# EAGLE board MyRev_CC2541_Breakout_Board (EAGLE 6.4)
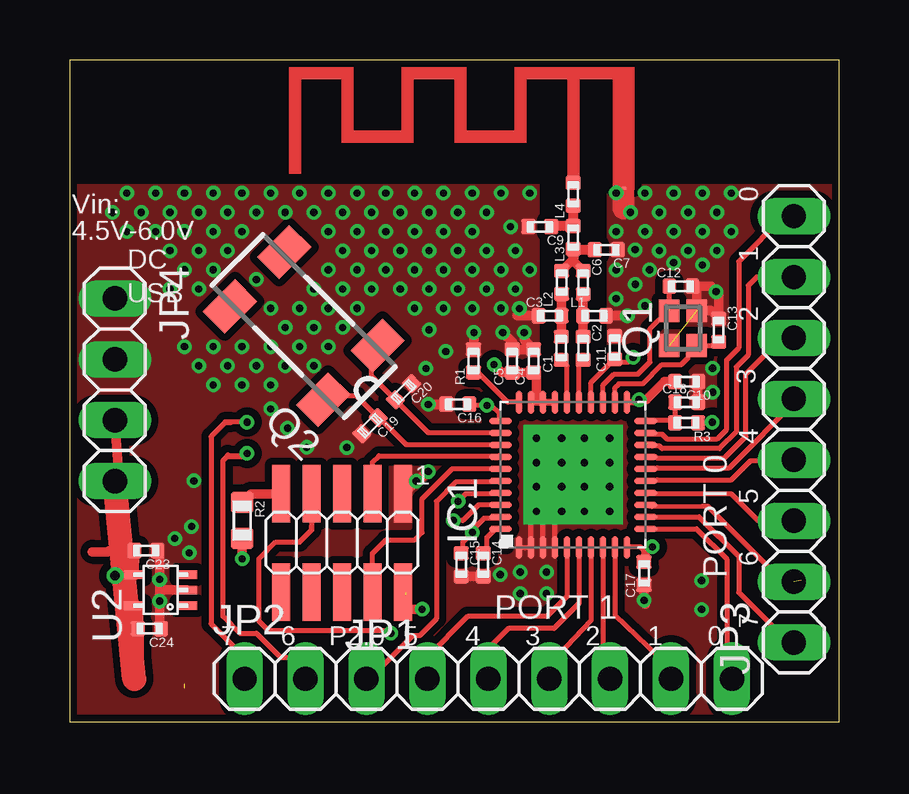
[diagram p0: board, top side]
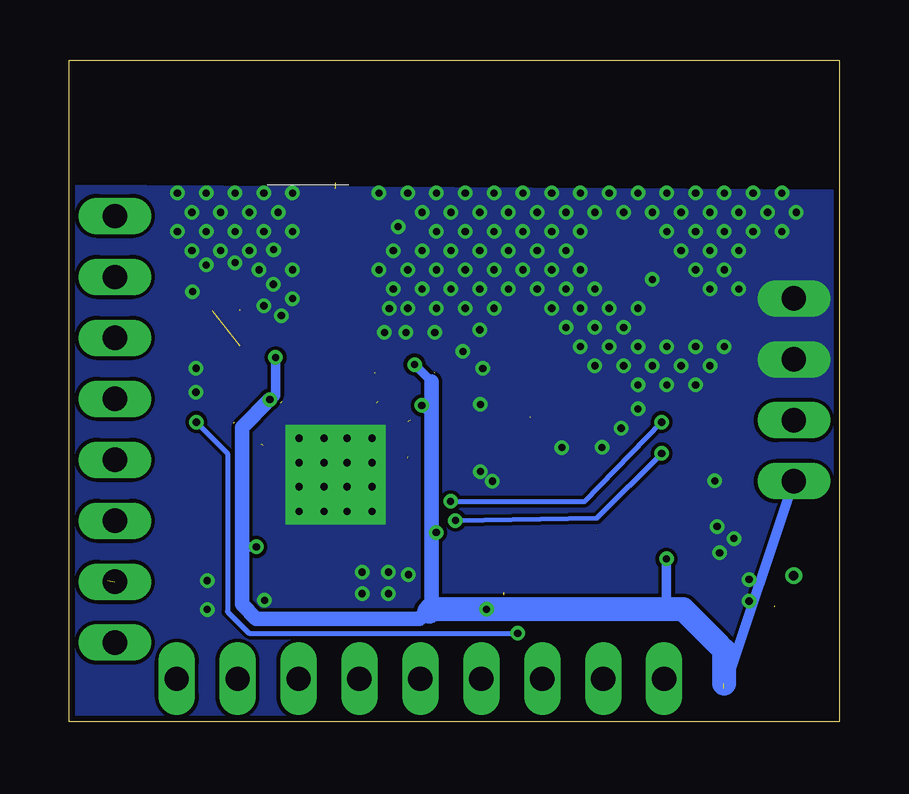
[diagram p1: board, bottom side, seen from below]

Size 32.1 x 27.6 mm. Coordinates in mm from the lower left corner, seen from the top.
Outline: 0,0 32.1,0 32.1,27.6 0,27.6 0,0
Copper layers (1*16): Top 0.035mm / dielectric 1.5mm / Bottom 0.035mm
Design rules "default": minimum track width 6mil, minimum drill 0.3mm, track to track 6mil, track to pad 6mil, pad to pad 6mil, via to via 6mil, smd to smd 0mil, copper to edge 10mil, drill to drill 10mil, minimum pad ring 10mil, minimum via ring 6mil, stop-mask expansion 2mil, vias tented up to drill 100mil, thermal gap 10mil

## Footprints (pad centres in the part's own frame; a part is rotated, then mirrored left to right if it is on the bottom)
TI_2.4GHZ_MIFA_LEFT = smd 0.2 x 0.1: FEED 0,-0.06; GND 2.1,-0.06
C0402 = smd 0.59 x 0.64: 1 -0.48,0; 2 0.48,0
QFN40-6X6 = smd 0.95 x 0.28: 1 -3.025,2.25; 2 -3.025,1.75; 3 -3.025,1.25; 4 -3.025,0.75; 5 -3.025,0.25; 6 -3.025,-0.25; 7 -3.025,-0.75; 8 -3.025,-1.25; 9 -3.025,-1.75; 10 -3.025,-2.25; 21 3.025,-2.25; 22 3.025,-1.75; 23 3.025,-1.25; 24 3.025,-0.75; 25 3.025,-0.25; 26 3.025,0.25; 27 3.025,0.75; 28 3.025,1.25; 29 3.025,1.75; 30 3.025,2.25 | smd 0.28 x 0.95: 11 -2.25,-3.025; 12 -1.75,-3.025; 13 -1.25,-3.025; 14 -0.75,-3.025; 15 -0.25,-3.025; 16 0.25,-3.025; 17 0.75,-3.025; 18 1.25,-3.025; 19 1.75,-3.025; 20 2.25,-3.025; 31 2.25,3.025; 32 1.75,3.025; 33 1.25,3.025; 34 0.75,3.025; 35 0.25,3.025; 36 -0.25,3.025; 37 -0.75,3.025; 38 -1.25,3.025; 39 -1.75,3.025; 40 -2.25,3.025 | drill 0.3 pad 1.1 square: EXP@1 -1.525,1.525; EXP@2 -0.5,1.525; EXP@3 0.5,1.525; EXP@4 1.525,1.525; EXP@5 -1.525,0.475; EXP@6 -0.5,0.475; EXP@7 0.5,0.475; EXP@8 1.525,0.475; EXP@9 -1.525,-0.475; EXP@10 -0.5,-0.475; EXP@11 0.5,-0.475; EXP@12 1.525,-0.475; EXP@13 -1.525,-1.525; EXP@14 -0.5,-1.525; EXP@15 0.5,-1.525; EXP@16 1.525,-1.525
2X05_1.27_SMD = smd 0.76 x 2.4: 1 -2.54,-2.05; 2 -2.54,2.05; 3 -1.27,-2.05; 4 -1.27,2.05; 5 0,-2.05; 6 0,2.05; 7 1.27,-2.05; 8 1.27,2.05; 9 2.54,-2.05; 10 2.54,2.05
1X09 = drill 1.016 long: 1 -10.16,0; 2 -7.62,0; 3 -5.08,0; 4 -2.54,0; 5 0,0; 6 2.54,0; 7 5.08,0; 8 7.62,0; 9 10.16,0
1X08 = drill 1.016 long: 1 -8.89,0; 2 -6.35,0; 3 -3.81,0; 4 -1.27,0; 5 1.27,0; 6 3.81,0; 7 6.35,0; 8 8.89,0
1X04 = drill 1.016 long: 1 -3.81,0; 2 -1.27,0; 3 1.27,0; 4 3.81,0
FA-128 = smd 0.95 x 0.85: 1 -0.725,-0.575; 2 0.725,-0.575; 3 0.725,0.575; 4 -0.725,0.575
MC-306 = smd 1.3 x 1.9: 1 -2.75,-1.6; 2 2.75,-1.6; 3 2.75,1.6; 4 -2.75,1.6
C0603 = smd 0.9 x 0.95: 1 -0.75,0; 2 0.75,0
SC70 = smd 0.35 x 0.85: 1 -0.65,-1.1; 2 0,-1.1; 3 0.65,-1.1; 4 0.65,1.1; 5 -0.65,1.1

## Placement (x,y rotation side)
A1  TI_2.4GHZ_MIFALEFT  [TI_2.4GHZ_MIFA_LEFT]  21,22.3 0 top
C1  18p  [C0402]  20.51,15.58 90 top
C2  18p  [C0402]  21.41,15.58 270 top
C3  1p  [C0402]  20.03,16.93 0 top
C4  220p  [C0402]  19.35,15.05 90 top
C5  100n  [C0402]  18.46,15.05 90 top
C6  1p  [C0402]  21.42,18.32 270 top
C7  DNM  [C0402]  22.38,19.69 180 top
C9  1p  [C0402]  19.61,20.65 180 top
C10  100n  [C0402]  25.73,14.19 180 top
C11  100n  [C0402]  22.73,15.61 90 top
C12  12p  [C0402]  25.49,18.17 0 top
C13  12p  [C0402]  27.07,16.33 270 top
C14  1u  [C0402]  17.25,6.55 270 top
C15  1u  [C0402]  16.33,6.55 270 top
C16  100n  [C0402]  16.19,13.25 180 top
C17  C0402  [C0402]  23.95,6.19 90 top
C18  100n  [C0402]  25.73,13.33 0 top
C19  15p  [C0402]  12.53,12.35 225 top
C20  15p  [C0402]  13.93,13.77 225 top
C23  100n  [C0402]  3.19,7.14 180 top
C24  470n  [C0402]  3.34,3.88 180 top
IC1  CC2540  [QFN40-6X6]  20.99,10.3 90 top
JP1  [2X05_1.27_SMD]  11.37,7.46 180 top
JP2  [1X09]  17.46,1.8 0 top
JP3  [1X08]  30.2,12.2 90 top
JP4  [1X04]  1.89,13.85 270 top
L1  2n  [C0402]  21.88,16.93 0 top
L2  2n  [C0402]  20.52,18.32 90 top
L3  1n  [C0402]  21,20.2 90 top
L4  3n  [C0402]  21,22 90 top
Q1  FA-128  [FA-128]  25.58,16.42 90 top
Q2  MC-306  [MC-306]  9.76,16.51 135 top
R1  56k  [C0402]  16.84,15.05 90 top
R2  R0603  [C0603]  7.2,8.4 270 top
R3  2.7k  [C0402]  25.73,12.47 180 top
U2  TPS71530  [SC70]  3.8,5.5 90 top

## Library data of the parts
A1 = antennas
C1-C7 C9-C20 C23 C24 L1-L4 R1-R3 = smd-ipc
IC1 U2 = texas
JP1-JP4 = pinhead
Q1 = crystal
Q2 = crystal; MPN: MC-306 60.0KHZ 100PPM ,12.5PF; OC_FARNELL: 1278040; OC_NEWARK: 31M5576

## Nets
GND: A1.GND C3.1 C4.2 C5.2 C7.1 C9.2 C10.1 C11.2 C12.2 C13.1 C14.2 C15.2 C16.2 C17.1 C18.2 C19.2 C20.1 C23.1 C24.1 IC1.1 IC1.2 IC1.3 IC1.4 IC1.EXP@1 IC1.EXP@2 IC1.EXP@3 IC1.EXP@4 IC1.EXP@5 IC1.EXP@6 IC1.EXP@7 IC1.EXP@8 IC1.EXP@9 IC1.EXP@10 IC1.EXP@11 IC1.EXP@12 IC1.EXP@13 IC1.EXP@14 IC1.EXP@15 IC1.EXP@16 JP1.1 JP4.1 JP4.2 L1.2 Q1.2 Q1.4 R1.2 U2.2
N$1: C1.1 IC1.26
N$2: C2.2 IC1.25
N$3: C1.2 C3.2 L2.1
N$4: C2.1 C6.2 L1.1
N$5: C6.1 C7.2 L2.2 L3.1
N$6: C9.1 L3.2 L4.1
N$7: IC1.30 R1.1
N$8: C13.2 IC1.22 Q1.1
N$9: C12.1 IC1.23 Q1.3
N$10: C14.1 IC1.40
N$11: JP1.7 R3.1
N$12: JP1.9 R2.1
N$13: IC1.34 JP1.3
N$14: IC1.35 JP1.4
N$15: C18.1 IC1.20 R3.2
N$16: C20.2 IC1.32 Q2.1
N$17: C19.1 IC1.33 Q2.4
N$18: IC1.19 JP3.8
N$19: IC1.18 JP3.7
N$20: IC1.17 JP3.6
N$21: IC1.16 JP3.5
N$22: IC1.15 JP3.4
N$23: IC1.14 JP3.3
N$24: IC1.13 JP3.2
N$25: IC1.12 JP3.1
N$26: IC1.11 JP2.9
N$27: IC1.9 JP2.8
N$28: IC1.7 JP2.6
N$29: IC1.8 JP2.7
N$31: IC1.6 JP2.5
N$32: IC1.38 JP2.2
N$33: IC1.37 JP2.1
N$36: C23.2 U2.4
N$39: IC1.36 JP2.3
N$42: IC1.5 JP2.4
N$44: A1.FEED L4.2
NC2: U2.3
VDD: C4.1 C5.1 C10.2 C11.1 C15.1 C16.1 C17.2 C24.2 IC1.10 IC1.21 IC1.24 IC1.27 IC1.28 IC1.29 IC1.31 IC1.39 JP1.2 JP4.3 JP4.4 R2.2 U2.5

## Tracks (layer width: path | path; a pad name or v marks a point on that pad's centre or on a via)
GND  (via drill 0.3)  (1 unrouted)
  Top 0.2: IC1.4 20.24,8.78 IC1.EXP@5 19.74,8.78 | IC1.3 19.74,8.78 | 19.74,8.78 19.24,8.78 IC1.2 IC1.1 | v23.96,5.07 23.96,5.66 24,5.7 23.99,5.71 C17.1
  Top 0.4: v14.96,10.44 13.93,9.54 JP1.1 | v14.96,13.24 C16.2 | v16.86,16.24 R1.2 | v18.96,16.24 18.96,15.93 C4.2 C5.2 18.46,15.84 v18.06,16.24 | C3.1 18.66,16.93 v18.76,17.24 | L1.2 v23.26,16.93 v23.26,16.94 | C12.2 26.73,18.17 v26.96,17.94 27.07,17.83 C13.1 26.73,17.14 Q1.2 26.15,18.05 26.2,18.1 | C17.1 23.95,5.05 23.9,5 24,4.9 | C15.2 C14.2 | C23.1 3.76,7.05 v3.76,5.94 | v3.76,5.94 v3.76,5.04 3.8,5 3.76,4.96 3.76,3.92 | U2.2 3.76,5.5 v3.76,5.94 | C18.2 26.2,14.1
  Top 0.9: A1.GND 23.1,21.4
  other vias: 26.81,14.75 14.86,14.74 23.58,19.69 18.39,20.65 11.56,11.44 26.82,13.75 17.96,6.14 19.19,22.05 17.99,22.05 16.79,22.05 5.99,20.45 4.79,20.45 3.59,20.45 13.19,20.45 11.99,20.45 10.79,20.45 13.79,21.25 12.59,21.25 11.39,21.25 11.99,22.05 10.79,22.05 9.59,22.05 15.59,22.05 14.39,22.05 13.19,22.05 17.39,21.25 16.19,21.25 14.99,21.25 25.19,22.05 23.99,22.05 22.79,22.05 27.59,22.05 26.39,22.05 26.39,20.45 25.19,20.45 23.99,20.45 22.79,20.45 26.99,21.25 18.59,19.65 19.19,18.85 26.39,19.05 25.19,19.15 19.89,6.25 19.89,5.35 18.79,5.35 18.79,6.25 26.99,19.65 25.79,19.65 24.59,19.65 22.79,18.85 23.59,18.25 22.79,17.65 24.19,18.85 23.99,17.35 25.79,21.25 24.59,21.25 23.39,21.25 26.35,5.89 26.35,4.69 8.39,14.05 7.19,14.05 5.99,14.05 6.59,14.85 5.39,14.85 7.19,15.65 5.99,15.65 4.79,15.65 10.19,14.85 8.99,14.85 7.79,14.85 10.79,15.65 9.59,15.65 8.39,15.65 11.39,16.45 10.19,16.45 8.99,16.45 10.79,17.25 9.59,17.25 8.39,17.25 14.39,17.25 11.99,17.25 17.99,17.25 16.79,17.25 15.59,17.25 16.19,18.05 14.99,18.05 13.79,18.05 18.59,18.05 17.39,18.05 17.99,18.85 16.79,18.85 15.59,18.85 17.39,19.65 16.19,19.65 14.99,19.65 16.79,20.45 15.59,20.45 14.39,20.45 14.39,18.85 13.19,18.85 11.99,18.85 10.79,18.85 7.79,18.45 13.79,19.65 12.59,19.65 11.39,19.65 12.59,18.05 11.39,18.05 10.19,18.05 5.39,18.05 4.19,18.05 5.99,18.85 4.79,18.85 6.59,19.65 5.39,19.65 4.19,19.65 7.19,20.45 10.19,21.25 8.99,21.25 7.79,21.25 8.39,22.05 7.19,22.05 5.99,22.05 6.59,21.25 5.39,21.25 4.19,21.25 4.79,22.05 3.59,22.05 2.39,22.05 2.99,21.25 1.79,21.25 2.39,20.45 14.99,16.35 15.69,15.45 27.59,20.45 14.46,10.04 4.99,7.05 4.39,7.65 5.09,8.15 5.19,10.05 8.39,13.05 9.09,12.25 9.89,11.45
  pour Bottom (no thermals): 32.1,22.4 0,22.2 0,-0.2 32.1,0
  pour Top (isolate 0.305, rank 6, no thermals): 19.6,22.4 0,22.4 0,0 32.1,0 32.1,22.4 22.4,22.4 22.4,13.7 19.6,13.7
N$1
  Top 0.2: IC1.26 20.74,14.86 C1.1
N$2
  Top 0.2: IC1.25 21.24,14.93 C2.2
N$3
  Top 0.4: L2.1 C3.2 C1.2
N$4
  Top 0.4: C6.2 21.41,17.82 L1.1 21.41,16.07 C2.1
N$5
  Top 0.4: L2.2 21,19.29 21,19.3 | C6.1 20.99,19.23
  Top 0.406: 21,19.7 L3.1 21,19.23 20.99,19.23 | 21,19.7 21,19.3 | 21,19.7 C7.2
N$6
  Top 0.406: C9.1 20.09,20.68 L3.2 L4.1
N$7  (1 unrouted)
  Top 0.2: IC1.30 18.27,13.33 17,14.6 16.9,14.6
N$8
  Top 0.2: IC1.22 22.74,13.95 22.9,14.1 23.9,14.1 24.7,14.9 25.5,14.9 25.8,15.2 25.8,15.35 Q1.1 26.91,15.7 C13.2
N$9  (1 unrouted)
  Top 0.2: IC1.23 22.24,14.04 22.7,14.5 23.7,14.5 24.2,15 24.2,16.4 25,17.2 | Q1.3 C12.1
N$10
  Top 0.2: C14.1 17.4,7.18 17.4,7.7 17.76,8.05 IC1.40
N$11  (via drill 0.3)  (1 unrouted)
  Top 0.2: R3.1 26.88,12.47 v26.8,12.5 | JP1.7 10.09,8.01 | v13.4,3.7 13.2,3.8 8.3,3.8 7.9,4.2 7.9,6.8 8.6,7.5 9.6,7.5 10.1,8 10.1,8.2
  Bottom 0.2: v13.4,3.7 24.6,3.7 25.5,4.6 25.5,11.2 v26.8,12.5
N$12
  Top 0.4: JP1.9 7.56,9.52 R2.1
N$13  (1 unrouted)
  Top 0.2: JP1.3 12.63,10.84 12.9,11.1 17.9,11.1 18,11
N$14
  Top 0.2: JP1.4 12.63,7.04 13.2,7.6 14.4,7.6 14.7,7.9 14.7,9.3 15.96,10.55 IC1.35
N$15  (1 unrouted)
  Top 0.2: 24.02,12.5 IC1.20 24.06,12.6 25.2,12.6 25.2,12.5 | 25.2,12.4 25.2,12.5 | 25.2,12.5 25.3,12.5 | R3.2 C18.1
N$16
  Top 0.2: IC1.32 14.97,12.05 C20.2 12.6,14.42 12.6,15.2 12.84,15.44 Q2.1
N$17  (1 unrouted)
  Top 0.2: IC1.33 14.04,11.55 12.9,12.7 | C19.1 11.96,13.6 11.3,13.6 11.13,13.43 Q2.4
N$18
  Top 0.2: IC1.19 24.08,12 24.7,12 24.9,11.8 27,11.8 27.4,12.2 27.4,15.1 27.9,15.6 27.9,19.2 29.79,21.09 JP3.8
N$19  (1 unrouted)
  Top 0.2: JP3.7 28.65,18.55 28.3,18.2 28.3,15.3 27.8,14.8 27.8,12.1 27.1,11.4 24.7,11.4 24.6,11.5 24.3,11.5 24.3,11.6 24.1,11.6
N$20
  Top 0.2: IC1.17 24.45,11.05 24.5,11 27.3,11 28.2,11.9 28.2,14.5 29.7,16 30.59,16 JP3.6
N$21
  Top 0.2: IC1.16 24.45,10.55 24.5,10.6 27.5,10.6 30.4,13.5 30.6,13.5 | 30.6,13.5 30.8,13.5 | JP3.5 30.6,13.5
N$22
  Top 0.2: IC1.15 24.45,10.05 24.5,10.1 27.6,10.1 28.4,10.9 30.57,10.9 JP3.4
N$23
  Top 0.2: JP3.3 28.71,8.39 27.6,9.5 24.08,9.5 IC1.14
N$24  (1 unrouted)
  Top 0.2: IC1.13 24.27,8.98 26.4,9 26.6,9 29.7,5.9 30.5,5.9 30.6,5.8
N$25
  Top 0.2: IC1.12 26.24,8.55 27.9,6.9 27.9,5.4 30,3.3 30.59,3.3 JP3.1
N$26
  Top 0.2: IC1.11 26.15,8.05 27.4,6.8 27.4,2.02 JP2.9
N$27
  Top 0.2: IC1.9 22.74,4.46 25,2.3 25,1.88 JP2.8
N$28
  Top 0.2: IC1.7 21.74,4.25 20,2.4 JP2.6
N$29
  Top 0.2: IC1.8 22.24,2 JP2.7
N$31
  Top 0.2: IC1.6 21.24,4.95 20.2,3.9 18.3,3.9 17.4,3 17.4,1.86 JP2.5
N$32  (via drill 0.3)
  Top 0.2: IC1.38 17.05,9.05 16.4,8.4 v16,8.4 | JP2.2 9.84,2.56 9.34,2.56 9.2,2.7 8.8,2.7 7.8,3.7 7.1,3.7 6.4,4.4 6.4,10.9 6.6,11.1 6.6,11.15
  Top 0.254: 6.6,11.1 7.4,11.1 v7.4,11.2
  Bottom 0.2: v16,8.4 10.1,8.5 v7.4,11.2
N$33  (via drill 0.3)
  Top 0.2: IC1.37 17.91,9.5 16.5,9.5 v16.2,9.2 | v7.4,12.5 6.7,12.5 | 6.5,12.5 5.9,11.9 5.9,4.1 7.3,2.7 JP2.1
  Top 0.254: 6.5,12.5 6.7,12.5
  Bottom 0.2: v16.2,9.2 10.6,9.2 v7.4,12.5
N$36  (via drill 0.4)
  Top 0.4: 0.95,7.1 1.6,7.1 1.64,7.14 C23.2 | C23.2 U2.4 2.7,6.1 | C23.2 2.7,6.1 | 2.7,6.1 v1.9,6.1
N$39
  Top 0.2: IC1.36 17.91,10 16.1,10 15.3,9.2 15.3,4.3 14.6,3.6 14.3,3.6 12.5,1.8 JP2.3
N$42
  Top 0.2: IC1.5 20.74,5.25 19.9,4.4 16.6,4.4 14.9,2.7 14.9,1.82 JP2.4
N$44  (1 unrouted)
VDD  (via drill 0.3)  (7 unrouted)
  Top 0.2: 23.3,13.4 23.3,13.3 23.2,13.4 | IC1.24 21.74,14.14 22.6,15 | 22.6,15 23.3,15 v23.5,15.2 | C11.1 22.6,15 | 22.6,15 22.6,15.1 | 19.37,14.57 19.47,14.6 | 19.47,13.4 19.3,13.3 19.71,13.3 IC1.28 | v24.3,7.3 23.94,6.77 C17.2 23.95,7.15 23.8,7.3 23.27,7.3 IC1.10 | IC1.39 17.91,8.5 17.3,8.5 16.8,8 v16.8,7.9 16.4,7.5 16.4,7.1 | 16.72,13.2 16.7,13.2 16.67,13.23 C16.1 16.72,13.2 | 17.9,12.6 17.9,12.9 17.6,13.2 v17.4,13.2 16.72,13.2 | 16.4,7.1 C15.1 16.3,7 16.4,7 16.4,7.1
  Top 0.254: IC1.21 23.74,13.33 v23.74,13.44
  Top 0.3: IC1.28 IC1.27
  Top 0.4: C5.1 19.37,14.57 | 19.47,14.6 19.47,13.4 | C4.1 18.02,14.57 v17.7,14.9 | R2.2 v7.2,6.8 | 2.7,4.7 2.8,4.8 2.7,4.8 | JP4.3 2.7,1.79 | v23.74,13.44 24.06,13.44 24.81,14.19 C10.2 | 2.7,3.88 C24.2 2.8,3.94 2.7,3.94 | v14.7,4.7 13.9,4.7 13.9,5.3 14,5.3 | 14,5.4 13.9,5.4 JP1.2
  Top 0.8: 2.7,3.94 2.7,4.7 | 2.7,3.88 2.7,1.79
  Top 1: 2.7,1.79 JP4.4
  Bottom 0.2: v16.8,7.9 17,8.1 | 17,14.2 17.1,14.1 17.1,13.5 v17.4,13.2
  Bottom 0.254: 23.7,13.4 23.74,13.4 v23.74,13.44
  Bottom 0.4: v24.3,7.3 24.9,7.3 | 17,5.3 17,4.8 | 17,12.8 v17.4,13.2 | 17,14.2 v17.7,14.9 | v23.5,15.2 23.5,13.6 23.7,13.4 | 5.05,3.25 4.8,3 | 4.8,1.3 4.8,1.4 4.79,1.39 JP4.4 | v7.2,6.8 7.2,4.7
  Bottom 0.6: 17,4.8 17.5,4.3 24.3,4.3 24.9,4.9 24.9,7.3 24.9,12.28 v23.74,13.44 | 17,14.2 17,8.1 17,5.3 17,4.7
  Bottom 1: 4.8,3 4.8,1.6 | 5.05,3.25 6.5,4.7 7.2,4.7 v14.7,4.7 17,4.7 17.1,4.6

## Text on the board
tSilk: 0 | Vin: | 4.5V-6.0V | DC | 1 | USB | 2 | 3 | 4 | 1 | 5 | PORT 0 | 6 | PORT 1 | 7 | 7 | 6 | P2.0 | 5 | 4 | 3 | 2 | 1 | 0